# Altium PCB Sound_Card_PCB.PcbDoc (part 2 of 2)
Units mil, origin at the board's own origin, x right, y up, seen from the top; angles counter-clockwise.
Board outline 5600 x 4000 mil, 4 copper layers (Top Layer, Plane(Gnd), Plane(Power), Bottom Layer), stack 23.756 mil thick; 267 components, 253 nets, 692 pads, 200 vias.
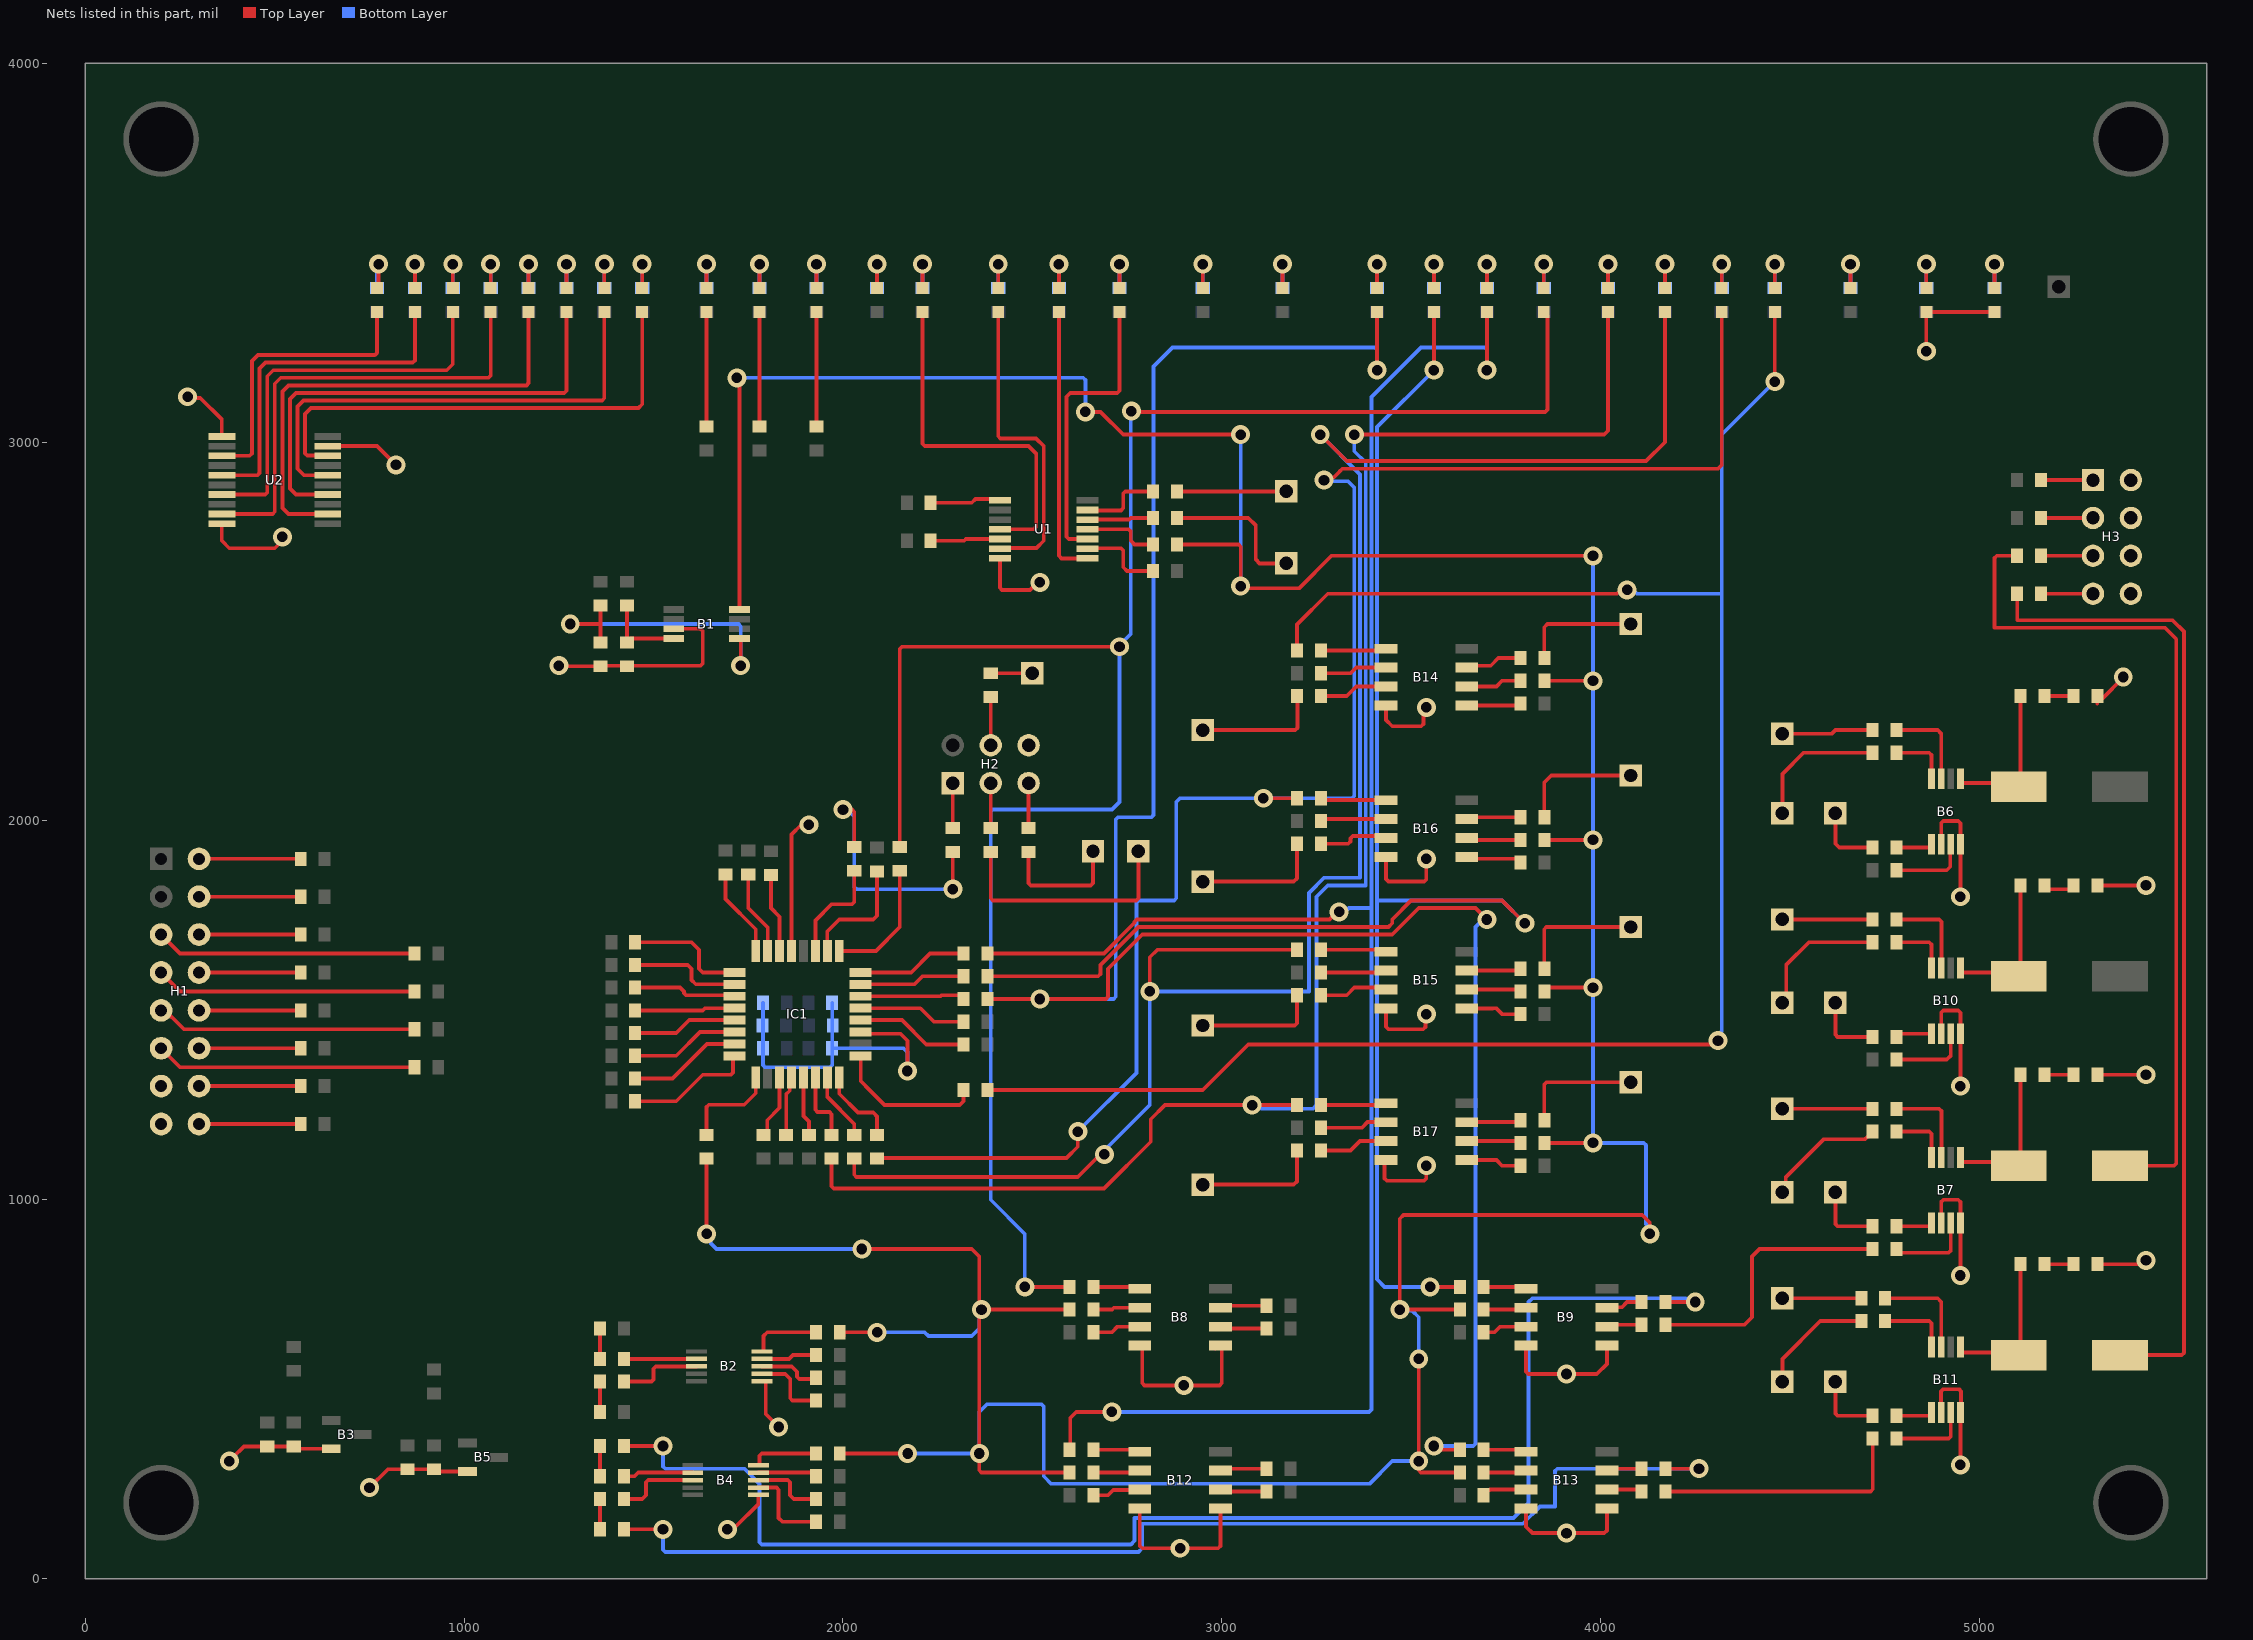
[diagram p4: the nets of this part, all layers, seen from the top]

## Via types
v1: diameter 50, hole 28, Top Layer to Bottom Layer, 200 vias

## Nets (pads, with @x,y where several pads share a name; then routed paths per layer and width w, separated by ;. In a path a pad name is that pad's centre, name@x,y a point inside that pad or via, vN(x,y) a via of type N, cw(c..) or ccw(c..) an arc to the next point about the centre after c; other vN are vias at no path point) (continued)
GND: B1.3 B2.6 B3.2 B4.6 B5.2 B6.2 B6.4 B7.2 B7.4 B8.4 B8.5 B9.4 B9.5 B10.2 B10.4 B11.2 B11.4 B12.4 B12.5 B13.4 B13.5 B14.4 B15.4 B16.4 B17.4 C2.1 C3.1 C5.1 C6.1 C9.2 C10.2 C11.2 C12.2 C13.2 C14.2 H1.13 H1.15 H2.6 H3.2 H3.4 H3.6 H3.8 IC1.19 IC1.29 LED17.1 LED18.1 R38.1 R39.2 R74.1 R75.1 R94.1 R95.1 U1.7 U2.1 U2.10 U2.19 | length 7891.7
  Top Layer w10: v1(270,3120) 273.28,3116.72 303.28,3116.72 360.24,3059.76 U2.1@360.24,3015.16 ; U2.10@360.24,2784.84 360.24,2739.76 380,2720 500,2720 520,2740 v1(520,2750) ; v1@390,320 418.5,348.5 C2.1@480,348.5 C3.1@550,348.5 555.91,342.6 B3.2@648.66,342.6 ; U2.19@639.76,2989.57 739.57,2989.57 740,2990 770,2990 v1(820,2940) ; v1(750,240) 798.5,288.5 C5.1@850,288.5 C6.1@920,288.5 925.91,282.6 B5.2@1008.66,282.6 ; v1(1250,2410) 1251.5,2408.5 R38.1@1360,2408.5 1361.5,2410 1624.14,2410 1630,2415.86 1630,2501.35 1624.14,2507.2 B1.3@1553.39,2507.2 ; v1@1700,130 ccw(c1700,154.14) 1717.07,137.07 1776.61,196.61 B4.6@1776.61,220.63 ; B2.6@1786.61,520.63 1795.09,520.63 1796,519.72 1796,434 v1(1830,400) ; IC1.29@1864.25,1656.85 1864.25,1964.25 1890,1990 v1(1910,1990) ; IC1.19@2046.85,1442.76 2051.54,1438.07 2151.93,1438.07 2170,1420 v1(2170,1340) ; U1.7@2414.33,2693.23 2414.33,2615.86 2420.19,2610 2494.14,2610 2514.14,2630 v1(2520,2630) ; B12.4@2783.27,185 2783.27,86.73 2790,80 v1(2890,80) ; B8.4@2783.27,615 2790,608.27 2790,515.86 2795.86,510 v1(2900,510) 2994.14,510 3000,515.86 3000,611.73 B8.5@2996.73,615 2990.86,615 B8.5@2983.06,607.2 ; B12.5@2993.06,181.33 B12.5@2996.73,185 2996.73,85.86 2990.87,80 v1@2910,80 ; B17.4@3433.27,1105 3430,1101.73 3430,1055.86 3435.86,1050 3534.14,1050 3540,1055.86 v1(3540,1090) ; B15.4@3433.27,1505 3433.27,1456.73 3440,1450 3531.72,1450 3537.57,1455.86 3537.57,1487.57 v1(3540,1490) ; B16.4@3433.27,1905 3433.27,1846.73 3440,1840 3534.14,1840 3540,1845.86 v1(3540,1900) ; B14.4@3433.27,2305 3433.27,2266.73 3450,2250 3526.49,2250 3532.35,2255.86 3532.35,2292.35 v1(3540,2300) ; B13.4@3803.27,185 3803.27,136.73 3820,120 4010,120 4016.73,126.73 B13.5@4016.73,185 ; B9.4@3803.27,615 3803.27,545.86 3809.13,540 3830,540 3990,540 4016.73,566.73 B9.5@4016.73,615 ; v1(4860,3240) LED18.1@4860,3343.5 LED17.1@5040,3343.5 ; B11.2@4899.06,423.39 4899.06,494.14 4904.92,500 4946,500 4951.86,494.14 4951.86,425 4950.24,423.39 4950.24,300.24 v1(4950,300) ; B7.2@4899.2,938.39 4899.2,994.14 4905.06,1000 4944.14,1000 4950,994.14 4950,938.77 B7.4@4950.39,938.39 4950.39,800.39 v1(4950,800) ; B10.2@4899.2,1438.39 4899.2,1493.76 4905.06,1499.61 4944.53,1499.61 4950.39,1493.76 B10.4@4950.39,1438.39 4950.39,1309.61 4950.86,1309.14 4950.86,1300.86 v1(4950,1300) ; B6.2@4899.2,1938.39 4899.2,1994.14 4905.06,2000 4944.14,2000 4950,1994.14 4950,1938.77 B6.4@4950.39,1938.39 4950.39,1800.39 v1(4950,1800) ; R95.1@5311.5,830 5430,830 v1(5440,840) ; R75.1@5311.5,1330 v1@5430,1330 ; R94.1@5311.5,1820 5321.5,1830 v1(5440,1830) ; 5311.5,2310 5311.5,2312.95 5322.24,2323.7 5325.2,2323.7 5380,2378.5 v1(5380,2380) ; v1@5430,1320 v1(5440,1330) ; v1(2890,80) v1@2910,80 ; v1(2890,80) 2895.86,74.14 2904.14,74.14 v1@2910,80
  Bottom Layer w10: C11.2@1788.5,1520 C10.2@1788.5,1400 1788.5,1355.86 1794.36,1350 1965.64,1350 1971.5,1355.86 C13.2@1971.5,1400 ; C14.2@1971.5,1520 C13.2@1971.5,1400 ; v1(2170,1340) 2170,1390 2160,1400 C13.2@1971.5,1400
  other v1: 3910,120 1695,130 380,310 3910,540
NetB1_4: B1.4 R26.1 R39.1 | length 224.6
  Top Layer w10: R26.1@1430,2568.5 R39.1@1430,2471.5 1440.12,2481.61 B1.4@1553.39,2481.61
NetB1_5: B1.5 R25.2 R38.2 | length 806.6
  Top Layer w10: v1(1280,2520) 1360,2520 ; R38.2@1360,2471.5 1360,2520 ; R25.2@1360,2568.5 1360,2520 ; B1.5@1726.61,2481.61 1730,2478.23 v1(1730,2410)
  Bottom Layer w10: v1(1280,2520) 1724.14,2520 1730,2514.14 v1(1730,2410)
NetB2_2: B2.2 R54.1 | length 192
  Top Layer w10: R54.1@1421.5,580 1421.81,579.68 B2.2@1613.39,579.68
NetB2_3: B2.3 R56.1 | length 224.8
  Top Layer w10: R56.1@1421.5,520 1494.14,520 1500,525.86 1500,553.83 1505.86,559.68 1613.07,559.68 B2.3@1613.39,560
NetB2_7: B2.7 R52.2 | length 201
  Top Layer w10: B2.7@1786.61,540.32 1847.68,540.32 1861,527 1861,475.86 1866.86,470 R52.2@1928.5,470
NetB2_8: B2.8 R55.2 | length 164.5
  Top Layer w10: B2.8@1786.61,560 1865,560 1879,546 1879,532.86 1884.86,527 1925.5,527 R55.2@1928.5,530
NetB2_9: B2.9 R57.2 | length 146.2
  Top Layer w10: B2.9@1786.61,579.68 1857.68,579.68 1868,590 R57.2@1928.5,590
NetB2_10: B2.10 R58.2 | length 182.1
  Top Layer w10: B2.10@1790,600.59 1790,640 1800,650 R58.2@1928.5,650
NetB4_2: B4.2 R61.1 | length 185.9
  Top Layer w10: R61.1@1421.5,270 1450,270 1459.68,279.69 B4.2@1603.39,279.69
NetB4_3: B4.3 R63.1 | length 222.6
  Top Layer w10: R63.1@1421.5,210 1470,210 1480,220 1480,254.14 1485.86,260 B4.3@1603.39,260
NetB4_7: B4.7 R60.2 | length 232.9
  Top Layer w10: B4.7@1776.61,240.31 1824.14,240.31 1830,234.46 1830,160 1840,150 R60.2@1928.5,150
NetB4_8: B4.8 R62.2 | length 192.6
  Top Layer w10: B4.8@1776.61,260 1854.14,260 1860,254.14 1860,220 1870,210 R62.2@1928.5,210
NetB4_9: B4.9 R64.2 | length 155.9
  Top Layer w10: B4.9@1776.61,279.69 1918.82,279.69 R64.2@1928.5,270
NetB4_10: B4.10 R65.2 | length 178.6
  Top Layer w10: B4.10@1776.61,299.37 1779.09,299.37 1780,300.28 1780,324.14 1785.86,330 R65.2@1928.5,330
NetB6_1: B6.1 R70.1 | length 98.2
  Top Layer w10: R70.1@4781.5,1930 4869.76,1930 4873.61,1933.86 B6.1@4873.61,1938.39
NetB6_3: B6.3 R66.2 | length 205.4
  Top Layer w10: R66.2@4781.5,1870 4914.14,1870 4923.06,1878.92 4923.06,1936.65 B6.3@4924.8,1938.39
NetB6_5: B6.5 C16.1 C18.1 | length 389.1
  Top Layer w10: B6.5@4950.39,2111.61 4950.39,2103.86 4954.24,2100 5094.14,2100 C16.1@5104.14,2090 5108.5,2094.36 5108.5,2310
NetB6_7: B6.7 R68.1 | length 240.7
  Top Layer w10: R68.1@4781.5,2240 4890,2240 4899.2,2230.8 B6.7@4899.2,2111.61
NetB6_8: B6.8 R72.1 | length 157.1
  Top Layer w10: R72.1@4781.5,2180 4867.76,2180 4873.61,2174.14 B6.8@4873.61,2111.61
NetB7_1: B7.1 R71.1 | length 98.2
  Top Layer w10: R71.1@4781.5,930 4869.76,930 4873.61,933.86 B7.1@4873.61,938.39
NetB7_3: B7.3 R67.2 | length 222.4
  Top Layer w10: R67.2@4781.5,870 4791.5,860 4918.94,860 4924.8,865.86 B7.3@4924.8,938.39
NetB7_5: B7.5 C17.1 C19.1 | length 399.1
  Top Layer w10: B7.5@4950.39,1111.61 4950.39,1103.86 4954.24,1100 5094.14,1100 C17.1@5104.14,1090 5108.5,1094.36 C19.1@5108.5,1320
NetB7_7: B7.7 R69.1 | length 243.8
  Top Layer w10: R69.1@4781.5,1240 4894.14,1240 4900,1234.14 4900,1112.41 B7.7@4899.2,1111.61
NetB7_8: B7.8 R73.1 | length 157.1
  Top Layer w10: R73.1@4781.5,1180 4867.76,1180 4873.61,1174.14 B7.8@4873.61,1111.61
NetB8_1: B8.1 R76.2 | length 123.8
  Top Layer w10: R76.2@2661.5,770 2778.27,770 B8.1@2783.27,765
NetB8_2: B8.2 R80.2 | length 123.8
  Top Layer w10: R80.2@2661.5,710 2710,710 2715,715 B8.2@2783.27,715
NetB8_3: B8.3 R84.2 | length 128
  Top Layer w10: R84.2@2661.5,650 2710,650 2725,665 B8.3@2783.27,665
NetB8_6: B8.6 R81.1 | length 123.8
  Top Layer w10: B8.6@2996.73,665 3001.73,660 R81.1@3118.5,660
NetB8_7: B8.7 R77.1 | length 123.8
  Top Layer w10: B8.7@2996.73,715 3001.73,720 R77.1@3118.5,720
NetB9_1: B9.1 R78.2 | length 113.8
  Top Layer w10: R78.2@3691.5,770 3798.27,770 B9.1@3803.27,765
NetB9_2: B9.2 R82.2 | length 113.8
  Top Layer w10: R82.2@3691.5,710 3798.27,710 B9.2@3803.27,715
NetB9_3: B9.3 R85.2 | length 118
  Top Layer w10: R85.2@3691.5,650 3720,650 3735,665 B9.3@3803.27,665
NetB9_6: B9.6 R83.1 | length 93.8
  Top Layer w10: B9.6@4016.73,665 4021.73,670 R83.1@4108.5,670
NetB9_7: B9.7 R79.1 | length 98
  Top Layer w10: B9.7@4016.73,715 4017.69,715.95 4055.95,715.95 4070,730 R79.1@4108.5,730
NetB10_1: B10.1 R90.1 | length 95.6
  Top Layer w10: R90.1@4781.5,1430 4789.88,1438.39 B10.1@4873.61,1438.39
NetB10_3: B10.3 R86.2 | length 205.4
  Top Layer w10: R86.2@4781.5,1370 4914.14,1370 4924.8,1380.65 B10.3@4924.8,1438.39
NetB10_5: B10.5 C20.1 C22.1 | length 399.1
  Top Layer w10: B10.5@4950.39,1611.61 4950.39,1603.86 4954.24,1600 5094.14,1600 C20.1@5104.14,1590 5108.5,1594.36 C22.1@5108.5,1820
NetB10_7: B10.7 R88.1 | length 243.8
  Top Layer w10: R88.1@4781.5,1740 4894.14,1740 4900,1734.14 4900,1612.41 B10.7@4899.2,1611.61
NetB10_8: B10.8 R92.1 | length 157.1
  Top Layer w10: R92.1@4781.5,1680 4867.76,1680 4873.61,1674.14 B10.8@4873.61,1611.61
NetB11_1: B11.1 R91.1 | length 103.7
  Top Layer w10: R91.1@4781.5,430 4869.76,430 4873.61,433.86 B11.1@4873.61,438.39 ; B11.1@4869.61,419.53 B11.1@4873.47,423.39
NetB11_3: B11.3 R87.2 | length 208.3
  Top Layer w10: R87.2@4781.5,370 4918.94,370 4924.8,375.86 B11.3@4924.8,438.39
NetB11_5: B11.5 C21.1 C23.1 | length 439.1
  Top Layer w10: B11.5@4950.24,596.61 C21.1@5083.39,596.61 ; C21.1@5054.65,625.35 C21.1@5083.39,596.61 ; C23.1@5108.5,830 5108.5,594.36 C21.1@5104.14,590 5090,590 C21.1@5083.39,596.61
NetB11_7: B11.7 R89.1 | length 270.7
  Top Layer w10: R89.1@4751.5,740 4890,740 4899.2,730.8 B11.7@4899.2,611.61
NetB11_8: B11.8 R93.1 | length 187.1
  Top Layer w10: R93.1@4751.5,680 4867.76,680 4873.61,674.14 B11.8@4873.61,611.61
NetB12_1: B12.1 R96.2 | length 124.5
  Top Layer w10: R96.2@2661.5,340 2776.77,340 B12.1@2783.27,333.5
NetB12_2: B12.2 R100.2 | length 123.2
  Top Layer w10: R100.2@2661.5,280 2779.76,280 B12.2@2783.27,283.5
NetB12_3: B12.3 R104.2 | length 127.4
  Top Layer w10: R104.2@2661.5,220 2700,220 2713.5,233.5 B12.3@2783.27,233.5
NetB12_6: B12.6 R101.1 | length 123.2
  Top Layer w10: B12.6@2996.73,233.5 3000.24,230 R101.1@3118.5,230
NetB12_7: B12.7 R97.1 | length 124.5
  Top Layer w10: B12.7@2996.73,283.5 3003.23,290 R97.1@3118.5,290
NetB13_1: B13.1 R98.2 | length 113.8
  Top Layer w10: R98.2@3691.5,340 3798.27,340 B13.1@3803.27,335
NetB13_2: B13.2 R102.2 | length 113.8
  Top Layer w10: R102.2@3691.5,280 3798.27,280 B13.2@3803.27,285
NetB13_3: B13.3 R105.2 | length 119.7
  Top Layer w10: R105.2@3691.5,220 3691.5,222.95 3702.24,233.7 3706.8,233.7 3708.1,235 B13.3@3803.27,235
NetB13_6: B13.6 R103.1 | length 93.8
  Top Layer w10: B13.6@4016.73,235 4103.5,235 R103.1@4108.5,230
NetB13_7: B13.7 R99.1 | length 93.8
  Top Layer w10: B13.7@4016.73,285 4021.73,290 R99.1@4108.5,290
NetB14_1: B14.1 R106.2 | length 173.8
  Top Layer w10: R106.2@3261.5,2450 3428.27,2450 B14.1@3433.27,2455
NetB14_2: B14.2 R108.2 | length 178
  Top Layer w10: R108.2@3261.5,2390 3340,2390 3355,2405 B14.2@3433.27,2405
NetB14_3: B14.3 R115.1 | length 182.1
  Top Layer w10: R115.1@3261.5,2330 3330,2330 3355,2355 B14.3@3433.27,2355
NetB14_5: B14.5 R110.2 | length 143.8
  Top Layer w10: B14.5@3646.73,2305 3783.5,2305 R110.2@3788.5,2310
NetB14_6: B14.6 R114.2 | length 148
  Top Layer w10: B14.6@3646.73,2355 3725,2355 3740,2370 R114.2@3788.5,2370
NetB14_7: B14.7 R111.1 | length 152.1
  Top Layer w10: B14.7@3646.73,2405 3651.73,2410 3710,2410 3730,2430 R111.1@3788.5,2430
NetB15_1: B15.1 R107.2 | length 173.8
  Top Layer w10: R107.2@3261.5,1660 3428.27,1660 B15.1@3433.27,1655
NetB15_2: B15.2 R109.2 | length 173.8
  Top Layer w10: R109.2@3261.5,1600 3428.27,1600 B15.2@3433.27,1605
NetB15_3: B15.3 R117.1 | length 182.1
  Top Layer w10: R117.1@3261.5,1540 3330,1540 3350,1560 3428.27,1560 B15.3@3433.27,1555
NetB15_5: B15.5 R112.2 | length 148.7
  Top Layer w10: B15.5@3646.73,1505 3715,1505 3715.86,1505.86 3724.14,1505.86 3740,1490 R112.2@3788.5,1490
NetB15_6: B15.6 R116.2 | length 143.8
  Top Layer w10: B15.6@3646.73,1555 3783.5,1555 R116.2@3788.5,1550
NetB15_7: B15.7 R113.1 | length 143.8
  Top Layer w10: B15.7@3646.73,1605 3783.5,1605 R113.1@3788.5,1610
NetB16_1: B16.1 R118.2 | length 173.8
  Top Layer w10: R118.2@3261.5,2060 3266.5,2055 B16.1@3433.27,2055
NetB16_2: B16.2 R120.2 | length 173.8
  Top Layer w10: R120.2@3261.5,2000 3266.5,2005 B16.2@3433.27,2005
NetB16_3: B16.3 R127.1 | length 187
  Top Layer w10: R127.1@3261.5,1940 3334.14,1940 3340,1945.86 3340,1954.14 3345.86,1960 3428.27,1960 B16.3@3433.27,1955
NetB16_5: B16.5 R122.2 | length 143.8
  Top Layer w10: B16.5@3646.73,1905 3651.73,1900 R122.2@3788.5,1900
NetB16_6: B16.6 R126.2 | length 143.8
  Top Layer w10: B16.6@3646.73,1955 3651.73,1950 R126.2@3788.5,1950
NetB16_7: B16.7 R123.1 | length 143.8
  Top Layer w10: B16.7@3646.73,2005 3651.73,2010 R123.1@3788.5,2010
NetB17_1: B17.1 R119.2 | length 173.8
  Top Layer w10: R119.2@3261.5,1250 3428.27,1250 B17.1@3433.27,1255
NetB17_2: B17.2 R121.2 | length 178
  Top Layer w10: R121.2@3261.5,1190 3370,1190 3385,1205 B17.2@3433.27,1205
NetB17_3: B17.3 R129.1 | length 182.1
  Top Layer w10: R129.1@3261.5,1130 3340,1130 3365,1155 B17.3@3433.27,1155
NetB17_5: B17.5 R124.2 | length 148
  Top Layer w10: B17.5@3646.73,1105 3725,1105 3740,1090 R124.2@3788.5,1090
NetB17_6: B17.6 R128.2 | length 143.8
  Top Layer w10: B17.6@3646.73,1155 3783.5,1155 R128.2@3788.5,1150
NetB17_7: B17.7 R125.1 | length 150.2
  Top Layer w10: B17.7@3650,1210 3646.73,1206.73 B17.7@3646.73,1205 3783.5,1205 R125.1@3788.5,1210
NetC1_1: C1.1 R54.2 | length 80
  Top Layer w10: R54.2@1358.5,580 C1.1@1358.5,660
NetC4_1: C4.1 R56.2 | length 80
  Top Layer w10: C4.1@1358.5,440 R56.2@1358.5,520
NetC7_1: C7.1 R61.2 | length 80
  Top Layer w10: R61.2@1358.5,270 C7.1@1358.5,350
NetC8_1: C8.1 R63.2 | length 80
  Top Layer w10: C8.1@1358.5,130 R63.2@1358.5,210
NetC18_2: C18.2 R74.2 | length 77
  Top Layer w10: C18.2@5171.5,2330 R74.2@5248.5,2330
NetC19_2: C19.2 R75.2 | length 77
  Top Layer w10: C19.2@5171.5,1330 R75.2@5248.5,1330
NetC22_2: C22.2 R94.2 | length 77
  Top Layer w10: C22.2@5171.5,1820 R94.2@5248.5,1820
NetC23_2: C23.2 R95.2 | length 77
  Top Layer w10: C23.2@5171.5,830 R95.2@5248.5,830
NetH1_2: H1.2 R1.2 | length 268.5
  Top Layer w10: H1.2@300,1900 R1.2@568.5,1900
NetH1_4: H1.4 R3.2 | length 268.5
  Top Layer w10: H1.4@300,1800 R3.2@568.5,1800
NetH1_5: H1.5 R7.1 | length 689.2
  Top Layer w10: H1.5@200,1700 250,1650 R7.1@868.5,1650
NetH1_6: H1.6 R6.2 | length 268.5
  Top Layer w10: H1.6@300,1700 R6.2@568.5,1700
NetH1_7: H1.7 R10.1 | length 689.2
  Top Layer w10: H1.7@200,1600 250,1550 R10.1@868.5,1550
NetH1_8: H1.8 R9.2 | length 268.5
  Top Layer w10: H1.8@300,1600 R9.2@568.5,1600
NetH1_9: H1.9 R12.1 | length 703.4
  Top Layer w10: H1.9@200,1500 200,1510 260,1450 R12.1@868.5,1450
NetH1_10: H1.10 R11.2 | length 268.5
  Top Layer w10: H1.10@300,1500 R11.2@568.5,1500
NetH1_11: H1.11 R14.1 | length 689.2
  Top Layer w10: H1.11@200,1400 250,1350 R14.1@868.5,1350
NetH1_12: H1.12 R13.2 | length 268.5
  Top Layer w10: H1.12@300,1400 R13.2@568.5,1400
NetH1_14: H1.14 R15.2 | length 268.5
  Top Layer w10: H1.14@300,1300 R15.2@568.5,1300
NetH1_16: H1.16 R16.2 | length 268.5
  Top Layer w10: H1.16@300,1200 R16.2@568.5,1200
NetH2_1: H2.1 R2.2 | length 118.5
  Top Layer w10: R2.2@2290,1981.5 H2.1@2290,2100
NetH2_3: H2.3 R4.2 | length 118.5
  Top Layer w10: R4.2@2390,1981.5 H2.3@2390,2100
NetH2_4: H2.4 R5.1 | length 127
  Top Layer w10: H2.4@2390,2200 R5.1@2390,2327.01
NetH2_5: H2.5 R8.2 | length 118.5
  Top Layer w10: R8.2@2490,1981.5 H2.5@2490,2100
NetH3_1: H3.1 R48.2 | length 168.5
  Top Layer w10: R48.2@5151.5,2900 H3.1@5320,2900
NetH3_3: H3.3 R49.2 | length 168.5
  Top Layer w10: R49.2@5151.5,2800 H3.3@5320,2800
NetH3_5: H3.5 R50.2 | length 168.5
  Top Layer w10: R50.2@5151.5,2700 H3.5@5320,2700
NetH3_7: H3.7 R51.2 | length 137
  Top Layer w10: R51.2@5162.99,2600 H3.7@5300,2600
NetIC1_1: IC1.1 R23.2 | length 324
  Top Layer w10: R23.2@1451.5,1680 1600,1680 1620,1660 1620,1610 1629.76,1600.24 IC1.1@1713.15,1600.24
NetIC1_2: IC1.2 R27.2 | length 300.5
  Top Layer w10: R27.2@1451.5,1620 1590,1620 1600,1610 1600,1580 1611.26,1568.74 IC1.2@1713.15,1568.74
NetIC1_3: IC1.3 R29.2 | length 273.5
  Top Layer w10: R29.2@1451.5,1560 1570,1560 1580,1550 1580,1545.86 1585.86,1540 1710.39,1540 IC1.3@1713.15,1537.24
NetIC1_4: IC1.4 R31.2 | length 264
  Top Layer w10: R31.2@1451.5,1500 1630,1500 1635.75,1505.75 IC1.4@1713.15,1505.75
NetIC1_5: IC1.5 R33.2 | length 275.8
  Top Layer w10: R33.2@1451.5,1440 1560,1440 1594.25,1474.25 IC1.5@1713.15,1474.25
NetIC1_6: IC1.6 R36.2 | length 287.6
  Top Layer w10: R36.2@1451.5,1380 1560,1380 1622.76,1442.76 IC1.6@1713.15,1442.76
NetIC1_7: IC1.7 R40.2 | length 299.5
  Top Layer w10: R40.2@1451.5,1320 1550,1320 1641.26,1411.26 IC1.7@1713.15,1411.26
NetIC1_8: IC1.8 R42.2 | length 335.1
  Top Layer w10: R42.2@1451.5,1260 1560,1260 1630,1330 1704.14,1330 1710,1335.86 1710,1376.61 IC1.8@1713.15,1379.76
NetIC1_9: IC1.9 R44.2 | length 257.8
  Top Layer w10: R44.2@1640,1173.78 1640,1244.89 1645.86,1250.75 1739.25,1250.75 1769.76,1281.26 IC1.9@1769.76,1323.15
NetIC1_11: IC1.11 R47.1 | length 169.4
  Top Layer w10: R47.1@1790,1171.5 1800,1181.5 1800,1210 1832.76,1242.76 IC1.11@1832.76,1323.15
NetIC1_12: IC1.12 R46.1 | length 157.6
  Top Layer w10: R46.1@1850,1171.5 1850,1278.33 1859.57,1287.9 1859.57,1318.46 IC1.12@1864.25,1323.15
NetIC1_13: IC1.13 R45.1 | length 159.7
  Top Layer w10: IC1.13@1895.75,1323.15 1895.75,1221.18 1910,1206.93 R45.1@1910,1169.37
NetIC1_14: IC1.14 R43.1 | length 191.1
  Top Layer w10: IC1.14@1927.24,1323.15 1927.24,1237.57 1933.1,1231.72 1964.14,1231.72 1970,1225.86 R43.1@1970,1167.98
NetIC1_15: IC1.15 R41.1 | length 181.2
  Top Layer w10: IC1.15@1958.74,1323.15 1958.74,1271.26 2030,1200 R41.1@2030,1171.5
NetIC1_16: IC1.16 R37.1 | length 216.4
  Top Layer w10: IC1.16@1990.24,1323.15 1990.24,1279.76 2040,1230 2080,1230 2090,1220 R37.1@2090,1171.5
NetIC1_17: IC1.17 R35.1 | length 398.6
  Top Layer w10: IC1.17@2046.85,1379.76 2046.85,1313.15 2070,1290 2110,1250 2308.5,1250 2318.5,1260 R35.1@2318.5,1290
NetIC1_20: IC1.20 R34.1 | length 298.3
  Top Layer w10: IC1.20@2046.85,1474.25 2155.75,1474.25 2220,1410 R34.1@2318.5,1410
NetIC1_21: IC1.21 R32.1 | length 286.5
  Top Layer w10: IC1.21@2046.85,1505.75 2204.25,1505.75 2240,1470 R32.1@2318.5,1470
NetIC1_22: IC1.22 R30.1 | length 276.9
  Top Layer w10: IC1.22@2046.85,1537.24 2257.24,1537.24 2260,1540 2308.5,1540 R30.1@2318.5,1530
NetIC1_23: IC1.23 R28.1 | length 280.5
  Top Layer w10: IC1.23@2046.85,1568.74 2188.74,1568.74 2210,1590 R28.1@2318.5,1590
NetIC1_24: IC1.24 R24.1 | length 292.3
  Top Layer w10: IC1.24@2046.85,1600.24 2180.24,1600.24 2230,1650 R24.1@2318.5,1650
NetIC1_25: IC1.25 R22.1 | length 334.4
  Top Layer w10: IC1.25@1990.24,1656.85 2086.85,1656.85 2150,1720 R22.1@2150,1868.5
NetIC1_26: IC1.26 R20.1 | length 317.2
  Top Layer w10: IC1.26@1958.74,1656.85 1958.74,1708.74 1990,1740 2080,1740 2090,1750 R20.1@2090,1867.01
NetIC1_27: IC1.27 R18.1 | length 285.9
  Top Layer w10: IC1.27@1927.24,1656.85 1927.24,1737.24 1970,1780 2024.14,1780 2030,1785.86 R18.1@2030,1868.5
NetIC1_30: IC1.30 R17.2 | length 209.6
  Top Layer w10: R17.2@1810,1857.01 1810,1770 1832.76,1747.24 IC1.30@1832.76,1656.85
NetIC1_31: IC1.31 R19.2 | length 222.9
  Top Layer w10: R19.2@1750,1858.5 1750,1770 1801.26,1718.74 IC1.31@1801.26,1656.85
NetIC1_32: IC1.32 R21.2 | length 234.7
  Top Layer w10: R21.2@1690,1858.5 1690,1793.91 1769.76,1714.14 IC1.32@1769.76,1656.85
NetLED1_2: LED1.2 R130.1 | length 127
  Top Layer w10: LED1.2@2090,3406.5 v1(2090,3470)
  Bottom Layer w10: R130.1@2090,3406.5 v1(2090,3470)
NetLED2_1: LED2.1 U1.6 | length 832.8
  Top Layer w10: LED2.1@2410,3343.5 2410,3015.86 2415.86,3010 2510,3010 2530,2990 2530,2740 2510.55,2720.55 2416.06,2720.55 U1.6@2414.33,2718.82
NetLED2_2: LED2.2 R132.1 | length 127
  Top Layer w10: LED2.2@2410,3406.5 v1(2410,3470)
  Bottom Layer w10: R132.1@2410,3406.5 v1(2410,3470)
NetLED3_1: LED3.1 U1.8 | length 722
  Top Layer w10: LED3.1@2570,3343.5 2570,2700 2576.77,2693.23 U1.8@2645.67,2693.23
NetLED3_2: LED3.2 R133.1 | length 127
  Top Layer w10: LED3.2@2570,3406.5 v1(2570,3470)
  Bottom Layer w10: R133.1@2570,3406.5 v1(2570,3470)
NetLED4_1: LED4.1 U1.10 | length 782
  Top Layer w10: U1.10@2645.67,2744.41 2595.86,2744.41 2590,2750.27 2590,3120 2600,3130 2724.14,3130 2730,3135.86 LED4.1@2730,3343.5
NetLED4_2: LED4.2 R134.1 | length 127
  Top Layer w10: LED4.2@2730,3406.5 v1(2730,3470)
  Bottom Layer w10: R134.1@2730,3406.5 v1(2730,3470)
NetLED5_1: LED5.1 U1.4 | length 950.6
  Top Layer w10: LED5.1@2210,3343.5 2210,2995.86 2215.86,2990 2490,2990 2510,2970 2510,2775.86 2504.14,2770 U1.4@2414.33,2770
NetLED5_2: LED5.2 R131.1 | length 127
  Top Layer w10: LED5.2@2210,3406.5 v1(2210,3470)
  Bottom Layer w10: R131.1@2210,3406.5 v1(2210,3470)
NetLED6_1: LED6.1 U2.18 | length 1310.3
  Top Layer w10: U2.18@639.76,2963.98 639.09,2964.65 585.86,2964.65 580,2970.5 580,3074.14 595.86,3090 1460,3090 1470,3100 LED6.1@1470,3343.5
NetLED6_2: LED6.2 R137.1 | length 127
  Top Layer w10: LED6.2@1470,3406.5 v1(1470,3470)
  Bottom Layer w10: R137.1@1470,3406.5 v1(1470,3470)
NetLED7_1: LED7.1 U2.16 | length 1297.7
  Top Layer w10: U2.16@639.76,2912.8 577.2,2912.8 560,2930 560,3094.14 575.86,3110 1364.14,3110 1370,3115.86 LED7.1@1370,3343.5
NetLED7_2: LED7.2 R138.1 | length 123.5
  Top Layer w10: LED7.2@1370,3410 v1(1370,3470)
  Bottom Layer w10: R138.1@1370,3406.5 v1(1370,3470)
NetLED8_1: LED8.1 U2.14 | length 1289.6
  Top Layer w10: U2.14@639.76,2861.61 555.86,2861.61 540,2877.47 540,3114.14 555.86,3130 1264.14,3130 1270,3135.86 LED8.1@1270,3343.5
NetLED8_2: LED8.2 R139.1 | length 127
  Top Layer w10: LED8.2@1270,3406.5 v1(1270,3470)
  Bottom Layer w10: R139.1@1270,3406.5 v1(1270,3470)
NetLED9_1: LED9.1 U2.12 | length 1280.8
  Top Layer w10: U2.12@639.76,2810.43 535.86,2810.43 520,2826.29 520,3134.14 535.86,3150 1164.14,3150 1170,3155.86 LED9.1@1170,3343.5
NetLED9_2: LED9.2 R140.1 | length 127
  Top Layer w10: LED9.2@1170,3406.5 v1(1170,3470)
  Bottom Layer w10: R140.1@1170,3406.5 v1(1170,3470)
NetLED10_1: LED10.1 U2.9 | length 1226.7
  Top Layer w10: U2.9@360.24,2810.43 494.14,2810.43 500,2816.29 500,3154.14 515.86,3170 1064.14,3170 1070,3175.86 LED10.1@1070,3343.5
NetLED10_2: LED10.2 R141.1 | length 127
  Top Layer w10: LED10.2@1070,3406.5 v1(1070,3470)
  Bottom Layer w10: R141.1@1070,3406.5 v1(1070,3470)
NetLED11_1: LED11.1 U2.7 | length 1069.6
  Top Layer w10: U2.7@360.24,2861.61 474.14,2861.61 480,2867.47 480,3174.14 495.86,3190 954.14,3190 970,3205.86 LED11.1@970,3343.5
NetLED11_2: LED11.2 R142.1 | length 127
  Top Layer w10: LED11.2@970,3406.5 v1(970,3470)
  Bottom Layer w10: R142.1@970,3406.5 v1(970,3470)
NetLED12_1: LED12.1 U2.5 | length 924.3
  Top Layer w10: U2.5@360.24,2912.8 454.14,2912.8 460,2918.65 460,3194.14 475.86,3210 864.14,3210 870,3215.86 LED12.1@870,3343.5
NetLED12_2: LED12.2 R143.1 | length 153.5
  Top Layer w10: LED12.2@870,3400 LED12.2@870,3406.5 v1@870,3480
  Bottom Layer w10: R143.1@870,3406.5 v1@870,3480
  other v1: 870,3470
NetLED13_1: LED13.1 U2.3 | length 773
  Top Layer w10: U2.3@360.24,2963.98 433.98,2963.98 440,2970 440,3214.14 455.86,3230 764.14,3230 770,3235.86 LED13.1@770,3343.5
NetLED13_2: LED13.2 R144.1 | length 150.8
  Top Layer w10: LED13.2@770,3400 774,3404 v1@774,3477
  Bottom Layer w10: R144.1@770,3406.5 770,3473 v1@774,3477
  other v1: 774,3470
NetLED14_1: LED14.1 R154.2 | length 302
  Top Layer w10: R154.2@1640,3041.5 LED14.1@1640,3343.5
NetLED14_2: LED14.2 R145.1 | length 127
  Top Layer w10: LED14.2@1640,3406.5 v1(1640,3470)
  Bottom Layer w10: R145.1@1640,3406.5 v1(1640,3470)
NetLED15_1: LED15.1 R155.2 | length 302
  Top Layer w10: R155.2@1780,3041.5 LED15.1@1780,3343.5
NetLED15_2: LED15.2 R146.1 | length 127
  Top Layer w10: LED15.2@1780,3406.5 v1(1780,3470)
  Bottom Layer w10: R146.1@1780,3406.5 v1(1780,3470)
NetLED16_1: LED16.1 R156.2 | length 302
  Top Layer w10: R156.2@1930,3041.5 LED16.1@1930,3343.5
NetLED16_2: LED16.2 R147.1 | length 123.5
  Top Layer w10: LED16.2@1930,3410 v1(1930,3470)
  Bottom Layer w10: R147.1@1930,3406.5 v1(1930,3470)
NetLED17_2: LED17.2 R135.1 | length 127
  Top Layer w10: LED17.2@5040,3406.5 v1(5040,3470)
  Bottom Layer w10: R135.1@5040,3406.5 v1(5040,3470)
NetLED18_2: LED18.2 R136.2 | length 127
  Top Layer w10: LED18.2@4860,3406.5 v1(4860,3470)
  Bottom Layer w10: R136.2@4860,3406.5 v1(4860,3470)
NetLED19_2: LED19.2 R157.1 | length 127
  Top Layer w10: LED19.2@3850,3406.5 v1(3850,3470)
  Bottom Layer w10: R157.1@3850,3406.5 v1(3850,3470)
NetLED20_2: LED20.2 R158.1 | length 127
  Top Layer w10: LED20.2@3700,3406.5 v1(3700,3470)
  Bottom Layer w10: R158.1@3700,3406.5 v1(3700,3470)
NetLED21_2: LED21.2 R159.1 | length 127
  Top Layer w10: LED21.2@3560,3406.5 v1(3560,3470)
  Bottom Layer w10: R159.1@3560,3406.5 v1(3560,3470)
NetLED22_2: LED22.2 R160.1 | length 127
  Top Layer w10: LED22.2@3410,3406.5 v1(3410,3470)
  Bottom Layer w10: R160.1@3410,3406.5 v1(3410,3470)
NetLED23_2: LED23.2 R161.1 | length 127
  Top Layer w10: LED23.2@3160,3406.5 v1(3160,3470)
  Bottom Layer w10: R161.1@3160,3406.5 v1(3160,3470)
NetLED24_2: LED24.2 R162.1 | length 127
  Top Layer w10: LED24.2@2950,3406.5 v1(2950,3470)
  Bottom Layer w10: R162.1@2950,3406.5 v1(2950,3470)
NetLED25_2: LED25.2 R163.1 | length 127
  Top Layer w10: LED25.2@4460,3406.5 v1(4460,3470)
  Bottom Layer w10: R163.1@4460,3406.5 v1(4460,3470)
NetLED26_2: LED26.2 R164.1 | length 127
  Top Layer w10: LED26.2@4320,3406.5 v1(4320,3470)
  Bottom Layer w10: R164.1@4320,3406.5 v1(4320,3470)
NetLED27_2: LED27.2 R165.1 | length 127
  Top Layer w10: LED27.2@4170,3406.5 v1(4170,3470)
  Bottom Layer w10: R165.1@4170,3406.5 v1(4170,3470)
NetLED28_2: LED28.2 R166.1 | length 127
  Top Layer w10: LED28.2@4020,3406.5 v1(4020,3470)
  Bottom Layer w10: R166.1@4020,3406.5 v1(4020,3470)
NetLED29_2: LED29.2 R167.1 | length 127
  Top Layer w10: LED29.2@4660,3406.5 v1(4660,3470)
  Bottom Layer w10: R167.1@4660,3406.5 v1(4660,3470)
NetR4_1: R4.1 TP2.1 | length 641.6
  Top Layer w10: R4.1@2390,1918.5 2390,1795.86 2395.86,1790 2774.14,1790 2780,1795.86 TP2.1@2780,1920
NetR5_2: R5.2 TP3.1 | length 110
  Top Layer w10: R5.2@2390,2390 TP3.1@2500,2390
NetR8_1: R8.1 TP4.1 | length 341.6
  Top Layer w10: R8.1@2490,1918.5 2490,1835.86 2495.86,1830 2654.14,1830 2660,1835.86 TP4.1@2660,1920
NetR68_2: R68.2 TP5.1 | length 242.6
  Top Layer w10: TP5.1@4480,2230 4610,2230 4620,2240 R68.2@4718.5,2240
NetR69_2: R69.2 TP6.1 | length 238.5
  Top Layer w10: TP6.1@4480,1240 R69.2@4718.5,1240
NetR70_2: R70.2 TP7.1 | length 182.6
  Top Layer w10: TP7.1@4620,2020 4620,1940 4630,1930 R70.2@4718.5,1930
NetR71_2: R71.2 TP8.1 | length 185.1
  Top Layer w10: TP8.1@4620,1020 4620,935.86 4625.86,930 R71.2@4718.5,930
NetR72_2: R72.2 TP9.1 | length 365.8
  Top Layer w10: TP9.1@4480,2020 4480,2124.14 4535.86,2180 R72.2@4718.5,2180
NetR73_2: R73.2 TP10.1 | length 324.1
  Top Layer w10: TP10.1@4480,1020 4488.67,1028.67 4488.67,1058.67 4590,1160 4698.5,1160 4704.8,1166.3 4707.76,1166.3 4718.5,1177.05 R73.2@4718.5,1180
NetR88_2: R88.2 TP11.1 | length 238.5
  Top Layer w10: TP11.1@4480,1740 R88.2@4718.5,1740
NetR89_2: R89.2 TP12.1 | length 208.5
  Top Layer w10: TP12.1@4480,740 R89.2@4688.5,740
NetR90_2: R90.2 TP13.1 | length 185.1
  Top Layer w10: TP13.1@4620,1520 4620,1435.86 4625.86,1430 R90.2@4718.5,1430
NetR91_2: R91.2 TP14.1 | length 185.1
  Top Layer w10: TP14.1@4620,520 4620,435.86 4625.86,430 R91.2@4718.5,430
NetR92_2: R92.2 TP15.1 | length 357.5
  Top Layer w10: TP15.1@4480,1520 4490,1530 4490,1620 4550,1680 R92.2@4718.5,1680
NetR93_2: R93.2 TP16.1 | length 309.9
  Top Layer w10: TP16.1@4480,520 4480,580 4580,680 R93.2@4688.5,680
NetR111_2: R111.2 TP17.1 | length 313.5
  Top Layer w10: R111.2@3851.5,2430 3851.5,2511.5 3860,2520 TP17.1@4080,2520
NetR113_2: R113.2 TP18.1 | length 335.1
  Top Layer w10: R113.2@3851.5,1610 3851.5,1714.14 3857.35,1720 TP18.1@4080,1720
NetR115_2: R115.2 TP19.1 | length 337.2
  Top Layer w10: TP19.1@2950,2240 3194.14,2240 3200,2245.86 3200,2328.5 R115.2@3198.5,2330
NetR117_2: R117.2 TP20.1 | length 325.1
  Top Layer w10: TP20.1@2950,1460 3192.65,1460 3198.5,1465.86 R117.2@3198.5,1540
NetR123_2: R123.2 TP21.1 | length 327.7
  Top Layer w10: R123.2@3851.5,2010 3851.5,2101.5 3870,2120 TP21.1@4080,2120
NetR125_2: R125.2 TP22.1 | length 305.1
  Top Layer w10: 3851.5,1230 3851.5,1304.14 3857.35,1310 TP22.1@4080,1310
NetR127_2: R127.2 TP23.1 | length 343.5
  Top Layer w10: TP23.1@2950,1840 3190,1840 3198.5,1848.5 R127.2@3198.5,1940
NetR129_2: R129.2 TP24.1 | length 333.5
  Top Layer w10: TP24.1@2950,1040 3190,1040 3198.5,1048.5 R129.2@3198.5,1130
NetR148_2: R148.2 U1.1 | length 188.3
  Top Layer w10: R148.2@2231.5,2840 2340,2840 2350,2850 2411.1,2850 U1.1@2414.33,2846.77
NetR149_2: R149.2 U1.5 | length 184.7
  Top Layer w10: R149.2@2231.5,2740 2320,2740 2324.41,2744.41 U1.5@2414.33,2744.41
NetR150_2: R150.2 U1.9 | length 224
  Top Layer w10: U1.9@2645.67,2718.82 2646.85,2720 2734.14,2720 2740,2714.14 2740,2670 2750,2660 R150.2@2818.5,2660
NetR151_2: R151.2 U1.11 | length 203.5
  Top Layer w10: U1.11@2645.67,2770 2754.14,2770 2760,2764.14 2760,2740 2770,2730 R151.2@2818.5,2730
NetR152_1: R152.1 TP25.1 | length 288.5
  Top Layer w10: R152.1@2881.5,2870 TP25.1@3170,2870
NetR152_2: R152.2 U1.13 | length 216.5
  Top Layer w10: U1.13@2645.67,2821.18 2646.85,2820 2734.14,2820 2740,2825.86 2740,2864.14 2745.86,2870 R152.2@2818.5,2870
NetR153_1: R153.1 U1.12 | length 174.7
  Top Layer w10: U1.12@2645.67,2795.59 2755.59,2795.59 2760,2800 R153.1@2818.5,2800
NetR153_2: R153.2 TP26.1 | length 390.9
  Top Layer w10: R153.2@2881.5,2800 3070,2800 3090,2780 3090,2690 3100,2680 TP26.1@3170,2680
POT_CS_0: LED19.1 R22.2 R76.1 | length 5274.7
  Top Layer w10: R22.2@2150,1931.5 2150,2454.14 2155.86,2460 v1(2730,2460) ; v1(2480,770) R76.1@2598.5,770 ; v1(2761.26,3082.15) 2763.41,3080 3854.14,3080 3860,3085.86 3860,3333.5 LED19.1@3850,3343.5
  Bottom Layer w10: v1(2480,770) 2480,910 2390,1000 2390,2024.14 2395.86,2030 2710,2030 2730,2050 v1(2730,2460) 2730,2464.14 2760,2494.14 2760,3080.89 v1(2761.26,3082.15)
POT_CS_1: LED20.1 R24.2 R96.1 | length 5196.2
  Top Layer w10: R24.2@2381.5,1650 2688.79,1650 2770,1731.21 2770,1734.14 2775.86,1740 3284.14,1740 3304.14,1760 v1(3310,1760) ; R96.1@2598.5,340 2600,341.5 2600,424.14 2615.86,440 v1(2710,440) ; v1(3700,3190) LED20.1@3700,3343.5
  Bottom Layer w10: v1(2710,440) 3389.14,440 3395,445.86 3395,1770 ; v1(3310,1760) 3317.65,1767.65 3333.51,1767.65 3335.86,1770 3395,1770 ; v1(3700,3190) 3700,3244.14 3694.14,3250 3525.86,3250 3395,3119.14 3395,1770
POT_CS_2: LED21.1 R28.2 R78.1 | length 4803.5
  Top Layer w10: R28.2@2381.5,1590 2674.14,1590 2680,1595.86 2680,1620 2780,1720 3440,1720 3450,1730 3450,1740 3500,1790 3740,1790 v1(3800,1730) ; v1(3550,770) R78.1@3628.5,770 ; v1(3560,3190) LED21.1@3560,3343.5
  Bottom Layer w10: v1(3550,770) 3430,770 3410,790 3410,1790 ; v1(3560,3190) 3410,3040 3410,1790 ; v1(3800,1730) 3740,1790 3410,1790
POT_CS_3: LED22.1 R30.2 R98.1 | length 5844.2
  Top Layer w10: R30.2@2381.5,1530 v1(2520,1530) 2694.14,1530 2700,1535.86 2700,1610 2790,1700 3450,1700 3520,1770 3670,1770 v1(3700,1740) ; v1(3410,3190) LED22.1@3410,3343.5 ; v1(3560,350) 3560,345.86 3565.86,340 R98.1@3628.5,340
  Bottom Layer w10: v1(2520,1530) 2714.14,1530 2720,1535.86 2720,2004.14 2725.86,2010 2814.14,2010 2820,2015.86 2820,3200 2870,3250 3404.14,3250 3410,3244.14 v1(3410,3190) ; v1(3560,350) 3664.14,350 3670,355.86 3670,1720 3690,1740 v1(3700,1740)
Rear_Left_AMP: R67.1 R83.2 | length 723.6
  Top Layer w10: R83.2@4171.5,670 4380,670 4400,690 4400,850 4420,870 R67.1@4718.5,870
Rear_Left_Res: C7.2 R79.2 | length 3755.7
  Top Layer w10: C7.2@1421.5,350 v1(1525,350) ; R79.2@4171.5,730 v1(4250,730)
  Bottom Layer w10: v1(1525,350) 1525,295.86 1530.86,290 1740,290 1780,250 1780,95.86 1785.86,90 2760,90 2770,100 2770,160 3770,160 3810,200 3810,730 3820,740 4224.14,740 4226.49,737.65 4242.35,737.65 v1(4250,730)
Rear_Left_Speaker: C17.2 R50.1 | length 2254.1
  Top Layer w10: R50.1@5088.5,2700 5045.86,2700 5040,2694.14 5040,2510 5490,2510 5520,2480 5520,1095.86 5514.14,1090 C17.2@5380,1090
Rear_Right_AMP: R87.1 R103.2 | length 683.6
  Top Layer w10: R103.2@4171.5,230 4712.65,230 4718.5,235.86 R87.1@4718.5,370
Rear_Right_Res: C8.2 R99.2 | length 3167.7
  Top Layer w10: C8.2@1421.5,130 v1(1525,130) ; R99.2@4171.5,290 v1(4260,290)
  Bottom Layer w10: v1(1525,130) 1525,75.86 1530.86,70 2780,70 2790,80 2790,144.64 3794.64,144.64 3840,190 3880,190 3880,284.14 3885.86,290 v1(4260,290)
Rear_Right_Speaker: C21.2 R51.1 | length 2597.1
  Top Layer w10: R51.1@5100,2600 5100,2530 5510,2530 5540,2500 5540,595.86 5534.14,590 C21.2@5371.86,590
SCLK: B1.8 R44.1 R58.1 R65.1 R80.1 R82.1 R100.1 R102.1 R114.1 R116.1 R126.1 R128.1 R151.1 | length 12129.8
  Top Layer w10: v1(1640,910) R44.1@1640,1108.5 ; v1(1720,3170) 1726.61,3163.39 B1.8@1726.61,2558.39 ; R65.1@1991.5,330 v1(2170.75,330) ; R58.1@1991.5,650 2001.5,640 2001.5,649.25 2002.24,650 v1(2090,650) ; v1(2050,870) 2340,870 2360,850 2360,715.86 v1(2365.86,710) ; R100.1@2598.5,280 2365.86,280 2360,285.86 v1(2360,330) 2360,704.14 v1(2365.86,710) ; R80.1@2598.5,710 v1(2365.86,710) ; v1(2640,3080) 2680,3080 2740,3020 v1(3050,3020) ; R151.1@2881.5,2730 3044.14,2730 3050,2724.14 v1(3050,2620) 3055.86,2614.14 3204.14,2614.14 3290,2700 v1(3980,2700) ; v1(3520,580) v1(3520,310) 3520,285.86 3525.86,280 R102.1@3628.5,280 ; R82.1@3628.5,710 v1(3470,710) 3470,950 3480,960 4110,960 4130,940 v1(4130,910) ; R128.1@3851.5,1150 v1(3980,1150) ; R116.1@3851.5,1550 3861.5,1560 v1(3980,1560) ; R126.1@3851.5,1950 v1(3980,1950) ; R114.1@3851.5,2370 v1(3980,2370)
  Bottom Layer w10: v1(1640,910) 1640,899.18 1651.21,887.96 1651.21,884.64 1665.86,870 v1(2050,870) ; v1(1720,3170) 2634.14,3170 2640,3164.14 v1(2640,3080) ; v1(2090,650) 2215.41,650 2225.41,640 2340,640 2360,660 2360,704.14 v1(2365.86,710) ; v1(2170.75,330) v1(2360,330) 2360,440 2380,460 2524.14,460 2530,454.14 2530,270 2550,250 3390,250 3450,310 v1(3520,310) ; v1(3050,2620) v1(3050,3020) ; v1(3470,710) 3473.28,706.72 3503.28,706.72 3520,690 v1(3520,580) ; v1(3980,2700) v1(3980,1950) v1(3980,1560) v1(3980,1150) 4114.14,1150 4120,1144.14 4120,935.86 4122.35,933.51 4122.35,917.65 v1(4130,910)
SRAM_CS_0: LED25.1 R35.2 R106.1 | length 5175.9
  Top Layer w10: R35.2@2381.5,1290 2950,1290 3070,1410 v1@4290,1410 ; R106.1@3198.5,2450 3198.5,2518.5 3280,2600 4044.14,2600 4046.49,2602.35 4062.35,2602.35 v1(4070,2610) ; v1(4460,3160) LED25.1@4460,3343.5
  Bottom Layer w10: v1(4070,2610) 4077.65,2602.35 4093.51,2602.35 4095.86,2600 4320,2600 ; v1(4310,1420) 4317.65,1427.65 4317.65,1443.51 4320,1445.86 4320,2600 ; v1(4460,3160) 4320,3020 4320,2600
SRAM_CS_1: LED26.1 R37.2 R118.1 | length 4553.5
  Top Layer w10: R37.2@2090,1108.5 2091.5,1110 2590,1110 2620,1140 v1(2620,1180) ; v1(3110,2060) R118.1@3198.5,2060 ; v1(3270,2900) 3277.65,2907.65 3296.83,2907.65 3312.43,2923.25 3312.43,2924.14 3318.28,2930 4310,2930 4320,2940 LED26.1@4320,3343.5
  Bottom Layer w10: v1(2620,1180) 2775,1335 2775,1784.14 2780.86,1790 2874.14,1790 2880,1795.86 2880,2050 2890,2060 v1(3110,2060) 3344.14,2060 3350,2065.86 3350,2880 3333.28,2896.72 3273.28,2896.72 v1(3270,2900)
SRAM_CS_2: LED27.1 R41.2 R107.1 | length 5044.7
  Top Layer w10: R41.2@2030,1108.5 2030,1065.86 2035.86,1060 2620,1060 2680,1120 v1(2690,1120) ; v1(2810,1550) 2810,1640 2830,1660 R107.1@3198.5,1660 ; v1(3260,3020) 3330,2950 4120,2950 4170,3000 LED27.1@4170,3343.5
  Bottom Layer w10: v1(2690,1120) 2690,1130 2810,1250 v1(2810,1550) 3230,1550 3230,1810 3270,1850 3365,1850 3365,2915 v1(3260,3020)
SRAM_CS_3: LED28.1 R43.2 R119.1 | length 4490.3
  Top Layer w10: R43.2@1970,1108.5 1970,1035.86 1975.86,1030 2689.5,1030 2812.5,1153 2812.5,1212.5 2850,1250 v1(3080,1250) R119.1@3198.5,1250 ; v1(3350,3020) 4010,3020 4020,3030 LED28.1@4020,3343.5
  Bottom Layer w10: v1(3080,1250) 3087.65,1242.35 3103.51,1242.35 3105.86,1240 3240,1240 3250,1250 3250,1800 3280,1830 3380,1830 3380,2946.21 3350,2976.21 v1(3350,3020)
UPDI: R2.1 R18.2 | length 709.4
  Top Layer w10: v1(2000,2030) 2024.14,2030 2030,2024.14 R18.2@2030,1931.5 ; v1(2290,1820) R2.1@2290,1918.5
  Bottom Layer w10: v1(2000,2030) 2010.82,2030 2023.25,2017.57 2024.14,2017.57 2030,2011.72 2030,1825.86 2035.86,1820 v1(2290,1820)
pads on no net: B2.4 B2.5 B3.3 B4.4 B4.5 B5.3

## Polygon pours and split planes (outlines as drawn)
no net on Bottom Layer "NONET_L04_P000" (solid, pour order 0): 0,4000 5600,4000 5600,0 0,0
no net on Top Layer "NONET_L01_P001" (solid, pour order 1): 0,4000 5600,4000 5600,0 0,0
GND on Plane(Gnd) (split plane): 5579.9,20.1 20.1,20.1 20.1,3979.9 5579.9,3979.9
+5 on Plane(Power) (split plane): 5579.9,20.1 20.1,20.1 20.1,3979.9 5579.9,3979.9

## Silkscreen, mask and mechanical layers (free items; w line width, h text height)
Top Overlay:
  lines w10: 717,3476 1527,3476 1527,3576 717,3576 717,3476 ; 717.5,3595 2282.5,3595 2282.5,3695 717.5,3695 717.5,3595 ; 1542,3476 2282,3476 2282,3576 1542,3576 1542,3476 ; 2302,3477 2832,3477 2832,3577 2302,3577 2302,3477 ; 2302,3597 2832,3597 2832,3697 2302,3697 2302,3597 ; 2852,3477 3302,3477 3302,3577 2852,3577 2852,3477 ; 2852,3597 3302,3597 3302,3697 2852,3697 2852,3597 ; 3325,3477 3925,3477 3925,3577 3325,3577 3325,3477 ; 3325,3597 3925,3597 3925,3697 3325,3697 3325,3597 ; 3945,3477 4545,3477 4545,3577 3945,3577 3945,3477 ; 3945,3597 4545,3597 4545,3697 3945,3697 3945,3597 ; 4561,3477 4759,3477 4759,3577 4561,3577 4561,3477 ; 4561,3597 4759,3597 4759,3697 4561,3697 4561,3597 ; 4776,3477 5126,3477 5126,3577 4776,3577 4776,3477 ; 4776,3597 5126,3597 5126,3697 4776,3697 4776,3597
  text "ABS Data Systems, Inc, (c) Copyright 2023" at 1410,3829.99 h60
  text "CPU Bus and Control" at 1175,3625 h40
  text "Control" at 2440,3625 h40
  text "DAC Select" at 2893,3625 h40
  text "Vol Select" at 3445,3625 h40
  text "SRAM Select" at 4040,3625 h40
  text "ADC" at 4610,3625 h40
  text "Power" at 4860,3625 h40
  text "D7" at 735,3505 h40
  text "D6" at 835,3505 h40
  text "D5" at 935,3505 h40
  text "D4" at 1035,3505 h40
  text "D3" at 1135,3505 h40
  text "D2" at 1235,3505 h40
  text "D1" at 1335,3505 h40
  text "D0" at 1435,3505 h40
  text "Int" at 1595,3505 h40
  text "Rst" at 1735,3505 h40
  text "CS" at 1895,3505 h40
  text "RD" at 2050,3505 h40
  text "WR" at 2175,3505 h40
  text "Din" at 2355,3505 h40
  text "Dout" at 2495,3505 h40
  text "Sclk" at 2655,3505 h40
  text "CS1" at 2910,3505 h40
  text "CS0" at 3100,3505 h40
  text "CS3" at 3350,3505 h40
  text "CS2" at 3502.78,3505 h40
  text "CS1" at 3655.55,3505 h40
  text "CS0" at 3795,3505 h40
  text "CS3" at 3970,3505 h40
  text "CS2" at 4122.78,3505 h40
  text "CS1" at 4275.55,3505 h40
  text "CS0" at 4415,3505 h40
  text "CS" at 4630,3505 h40
  text "3.3V" at 4810,3505 h40
  text "5V" at 5010,3505 h40
  text "P/N Sound-32958" at 4540,110 h40
Mechanical 1:
  the board outline again, w10

## Text inside footprints (layer, text, board x,y; h text height)
H2: Top Overlay "6" at 2560,2190 h40; Top Overlay "5" at 2560,2100 h40; Top Overlay "2" at 2190,2180 h40; Top Overlay "1" at 2210,2080 h40
H3: Top Overlay "2" at 5400,2970 h40; Top Overlay "1" at 5300,2970 h40; Top Overlay "7" at 5290,2470 h40; Top Overlay "8" at 5400,2470 h40